# Altium PCB JHDH-8412V1_KB.PcbDoc
Units mm, origin at the board's own origin, x right, y up, seen from the top; angles counter-clockwise.
Board outline 42.45 x 22.25 mm, 2 copper layers (Top Layer, Bottom Layer); 4 components, 6 nets, 33 pads, 0 vias.
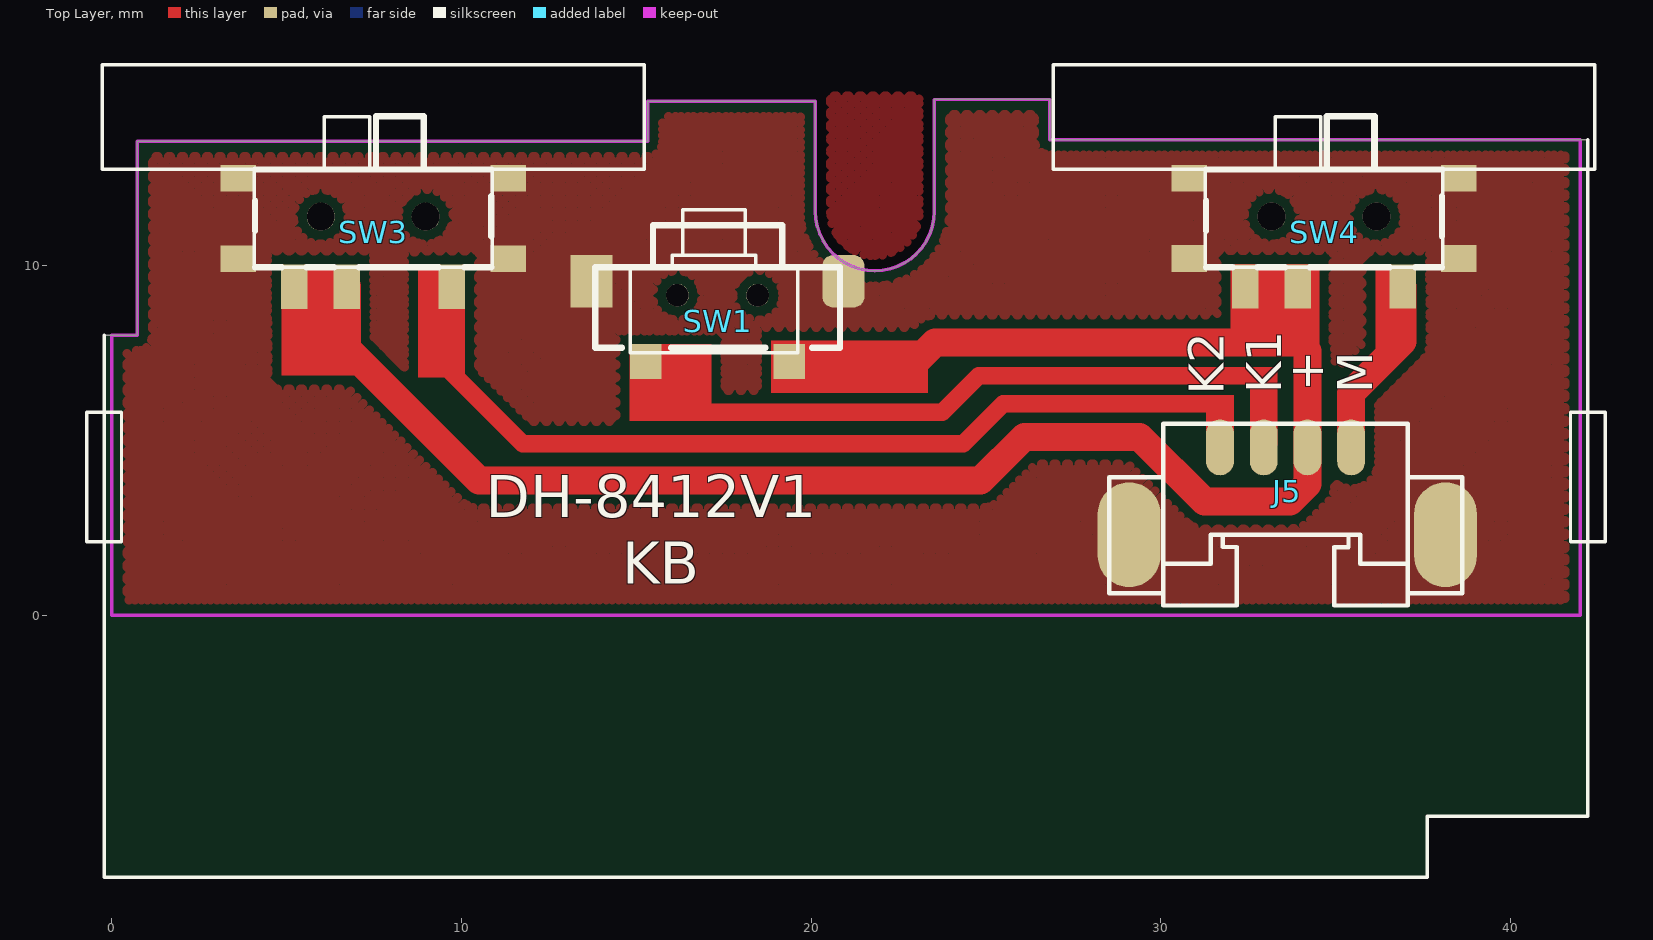
[diagram p0: Top Layer view]
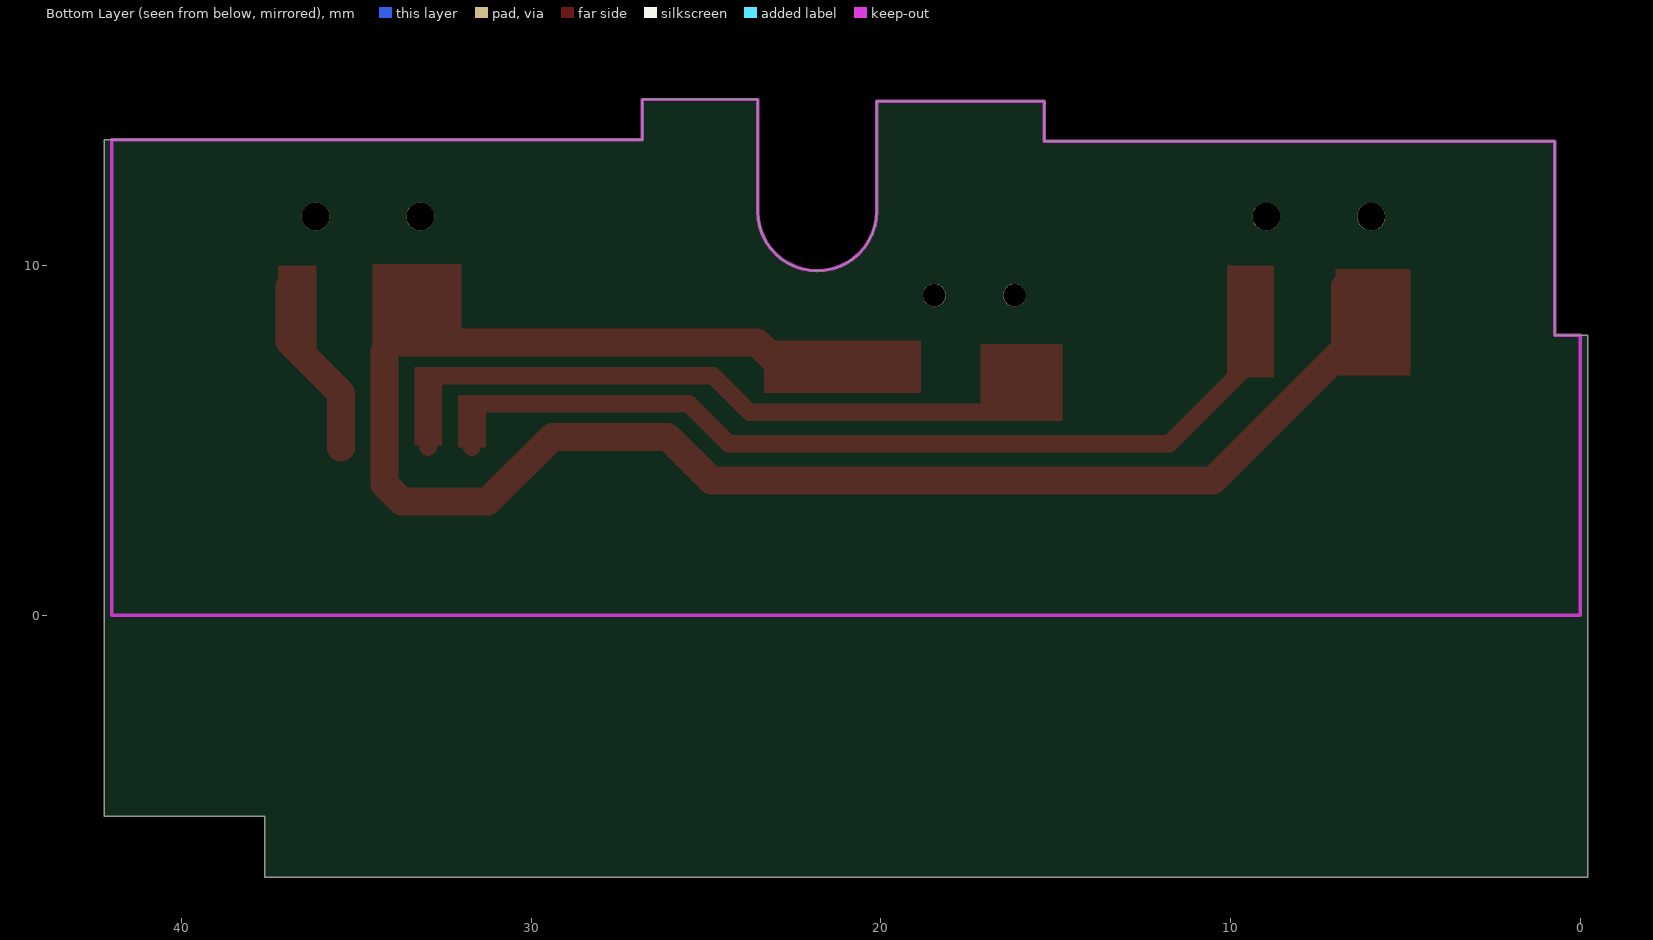
[diagram p1: Bottom Layer view, seen from below]
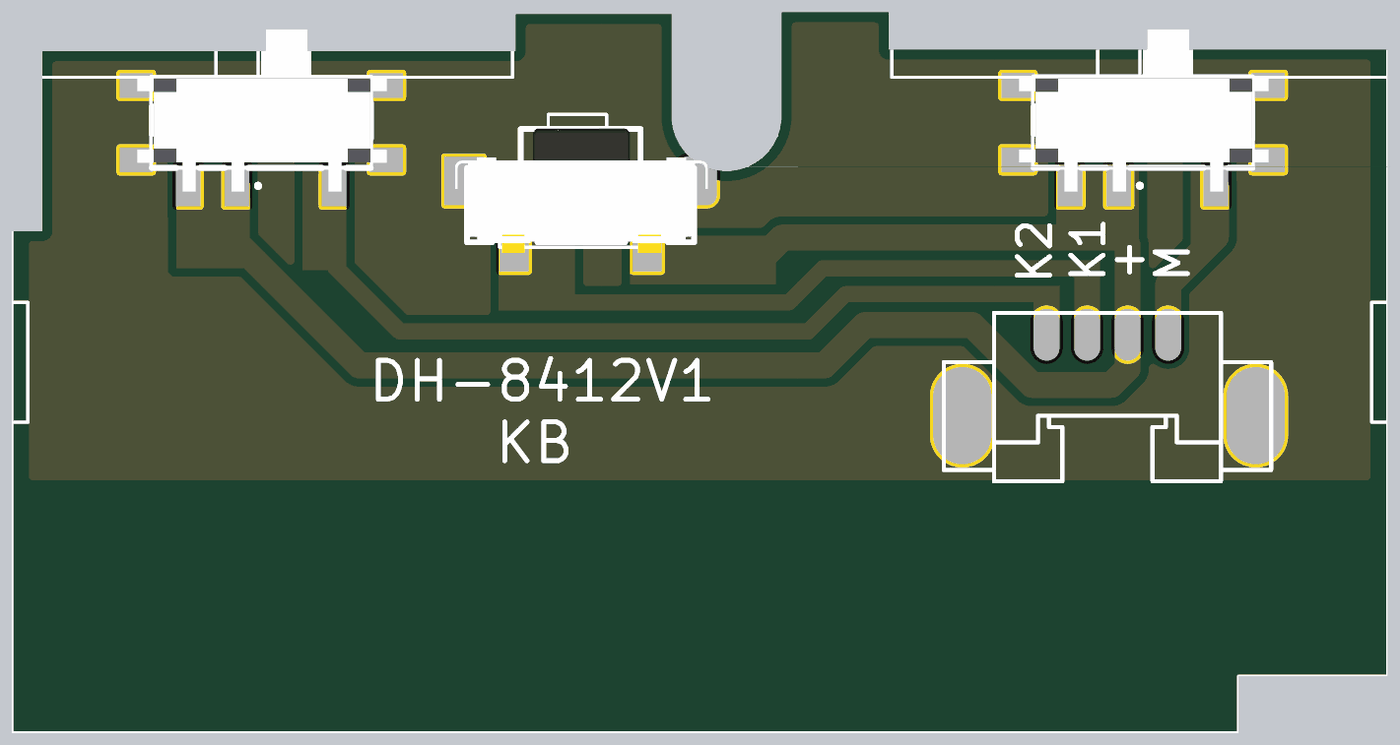
[diagram p2: 3D render of the assembled board from above, using the file's embedded part models]

## Layer stack, top to bottom
Top Solder: solder mask 0.0102, Solder Resist, Dk 3.5
Top Layer: signal copper 0.0356
Dielectric 1: dielectric 0.32, FR-4, Dk 4.8
Bottom Layer: signal copper 0.0356
Bottom Solder: solder mask 0.0102, Solder Resist, Dk 3.5

## Board outline
-0.225,-7.5 -0.225,8 0.725,8 0.725,13.55 15.325,13.55 15.325,14.7 20.125,14.7 20.125,11.55 ccw(c21.825,11.55) 21.825,9.85 ccw(c21.825,11.55) 23.525,11.55 23.525,14.75 26.825,14.75 26.825,13.6 42.225,13.6 42.225,-5.75 37.625,-5.75 37.625,-7.5

## Design rules (kind name [scope] priority, off if disabled: settings)
Clearance [All] p1: gap=0.254 ignorepadtopadclearanceinfootprint=FALSE except(0: Arc-Hole Track-Hole SMDPad-Hole THPad-Hole Via-Hole Fill-Hole Poly-Hole Region-Hole Text-Hole)
PolygonConnect [All] p1: connectstyle=Direct reliefconductorwidth=0.254 reliefentries=4 polygonreliefangle="90 Angle" airgapwidth=0.254
RoutingVias [All] p1: holewidth=0.711 width=1.27 viastyle="Through Hole" minholewidth=0.711 minwidth=1.27 maxholewidth=0.711 maxwidth=1.27
SolderMaskExpansion [All] p1: expansion=0.102
Width [All] p1: maxlimit=1 minlimit=0.254 preferedwidth=0.254
30 further rules are at their usual default settings.

## Components (designator, comment, footprint, x,y, rotation, side; value= is the part's Value field where it differs from the comment)
J5 "CON4" SIP-4/1.25/SMD 31.7,4.8 r180 top value=0.04
SW1 "SW" KEY/IT-1207 17.325,9.15 r180 top
SW3 "SW-2" SW/MK-12C01 8.975,11.398 r180 top
SW4 "SW" SW/MK-12C01 36.175,11.4 r180 top

## Footprints (in the part's own frame and the unit in brackets; to place one, negate y for a bottom-side part, rotate by r counter-clockwise, add the part's x,y. Pads: shape width x height; smd on the part's side, far side on the other; paste and mask are expansions set on the pad)
KEY/IT-1207 [mm] "3*6*3.5 大侧按"
  round 0.051 on Top Overlay: 0(0,0)
  rect 0.9x1 smd: 1(-2.05,1.9) 2(2.05,1.9)
  rrect50% 1.2x1.5 smd: ""(-3.6,-0.4)
  round 0.65 hole 0.65 unplated: ""(-1.15,0) ""(1.15,0)
  rect 1.2x1.5 smd: ""(3.6,-0.4)
  silkscreen extent -3.5,-2 3.5,1.5, body extent -3.93,-2.02 3.87,1.83, height 3.51
SIP-4/1.25/SMD [mm]
  oval 1.8x3 smd: 0(-6.45,2.5) 0(2.6,2.5)
  oval 0.8x1.6 smd: 1(0,0) 2(-1.25,0) 3(-2.5,0) 4(-3.75,0)
  silkscreen extent -6.93,-0.67 3.17,4.53
SW/MK-12C01 [mm] "七脚SS-1290柄长1.5MM或2.0MM"
  rect 1.016x0.762 smd: 0(-2.359,-1.1) 0(-2.359,1.2) 0(5.359,1.2) 0(5.359,-1.1)
  round 0.8 hole 0.8 unplated: 0(0,0) 0(3,0)
  round 0.254 on Top Overlay: 0(1.6,2)
  rect 0.762x1.27 smd: 1(2.254,2) 2(3.754,2) 3(-0.746,2)
  silkscreen extent -1.88,-2.87 4.88,1.45, body extent -2.37,-2.82 5.33,2.18, height 1.4

## Part data
J5: "Connector"
SW1: "Tact Switch"
SW3: "Slide Switch"
SW4: library part SW-2, "Slide Switch"

## Nets (pads, with @x,y where several pads share a name; then routed paths per layer and width w, separated by ;. In a path a pad name is that pad's centre, name@x,y a point inside that pad or via, vN(x,y) a via of type N, cw(c..) or ccw(c..) an arc to the next point about the centre after c; other vN are vias at no path point)
5V: J5.3 SW1.1 SW3.1 SW3.2 SW4.1 SW4.2 | length 52.8
  Top Layer w0.8: SW3.1 6.721,7.629 10.5,3.85 24.85,3.85 26.1,5.1 29.4,5.1 31.25,3.25 33.7,3.25 34.2,3.75 J5.3 34.2,7.55 33.95,7.8 23.55,7.8 23.1,7.35 19.475,7.35 SW1.1 ; 33.921,7.829 SW4.1
GND: J5.0 SW1.@13.725,9.55 SW1.@20.925,9.55 SW3.0@3.616,10.198 SW3.0@3.616,12.498 SW3.0@11.334,10.198 SW3.0@11.334,12.498 SW4.0@30.816,10.2 SW4.0@30.816,12.5 SW4.0@38.534,10.2 SW4.0@38.534,12.5
MODE: J5.4 SW4.3 | length 5.2
  Top Layer w0.8: J5.4 35.45,6.35 36.921,7.821 SW4.3
PB_KEY: J5.2 SW1.2 | length 20.9
  Top Layer w0.5: SW1.2 15.275,6.625 16.1,5.8 23.75,5.8 24.8,6.85 32.6,6.85 32.95,6.5 J5.2
PW_KEY: J5.1 SW3.3 | length 26.9
  Top Layer w0.5: SW3.3 9.721,6.929 11.75,4.9 24.35,4.9 25.5,6.05 31.5,6.05 31.7,5.85 J5.1
VBAT: 
pads on no net: SW1.0 SW1.@16.175,9.15 SW1.@18.475,9.15 SW3.0@5.975,11.398 SW3.0@7.375,9.398 SW3.0@8.975,11.398 SW4.0@33.175,11.4 SW4.0@34.575,9.4 SW4.0@36.175,11.4

## Polygon pours and split planes (outlines as drawn)
GND on Top Layer "GND" (hatched 45Degree grid 0.254 track 0.254, remove dead copper, pour order 0): 0.05,0 42.2,0 42.2,14.85 0.05,14.85

## Keep-outs
Keep-Out Layer:
  lines w0.1: 0,0 0,8 0.725,8 0.725,13.55 6.075,13.55 7.375,13.55 7.575,13.55 8.875,13.55 15.325,13.55 15.325,14.7 20.125,14.7 20.125,11.55 ccw(c21.825,11.55) 21.825,9.85 ccw(c21.825,11.55) 23.525,11.55 23.525,14.75 26.825,14.75 26.825,13.6 33.275,13.6 34.575,13.6 34.775,13.6 36.075,13.6 42,13.6 42,0 0,0

## Other copper
Top Layer:
  rectangle net PW_KEY: 31.3,4.8 32.1,6.3
  rectangle net PB_KEY: 32.55,4.85 33.35,7.1
  rectangle net MODE: 36.15,7.6 37.25,10
  rectangle net PW_KEY: 8.75,6.8 10.1,10
  rectangle net PB_KEY: 14.8,5.55 17.15,7.75
  rectangle net 5V: 18.85,6.35 23.35,7.85
  rectangle net 5V: 32,7.6 34.55,10.05
  rectangle net 5V: 4.85,6.85 7,9.9

## Silkscreen, mask and mechanical layers (free items; w line width, h text height)
Top Overlay:
  lines w0.1: -0.225,8 -0.225,0 -0.225,-7.5 37.625,-7.5 37.625,-5.75 42.225,-5.75 42.225,0 42.225,13.6 ; 4.075,12.75 4.075,9.95 10.875,9.95 10.875,12.75 ; 6.075,12.75 6.075,14.25 7.375,14.25 7.375,12.75 ; 7.575,12.75 7.575,14.25 8.875,14.25 8.875,12.75 ; 16.025,10 16.025,10.3 18.425,10.3 18.425,10 ; 16.325,10.3 16.325,11.6 18.125,11.6 18.125,10.3 ; 31.275,12.75 31.275,9.95 38.075,9.95 38.075,12.75 ; 33.275,12.75 33.275,14.25 34.575,14.25 34.575,12.75 ; 34.775,12.75 34.775,14.25 36.075,14.25 36.075,12.75 ; -0.725,2.1 -0.725,5.8 0.275,5.8 0.275,2.1 -0.725,2.1 ; -0.275,12.75 -0.275,15.75 15.225,15.75 15.225,12.75 -0.275,12.75 ; 14.825,7.5 14.825,10 19.625,10 19.625,7.5 14.825,7.5 ; 26.925,12.75 26.925,15.75 42.425,15.75 42.425,12.75 26.925,12.75 ; 41.725,2.1 41.725,5.8 42.725,5.8 42.725,2.1 41.725,2.1
  text "+" at 34.65,6.4 h1 r90
  text "K1" at 33.45,6.35 h1 r90
  text "M" at 36.05,6.35 h1 r90
  text "K2" at 31.8,6.3 h1 r90
  text "DH-8412V1" at 10.7,2.8 h1.2
  text "KB" at 14.6,0.9 h1.2
Mechanical 4:
  lines w0.1: 4.075,12.75 10.875,12.75 ; 31.275,12.75 38.075,12.75